# EAGLE board MODI (EAGLE 6.3)
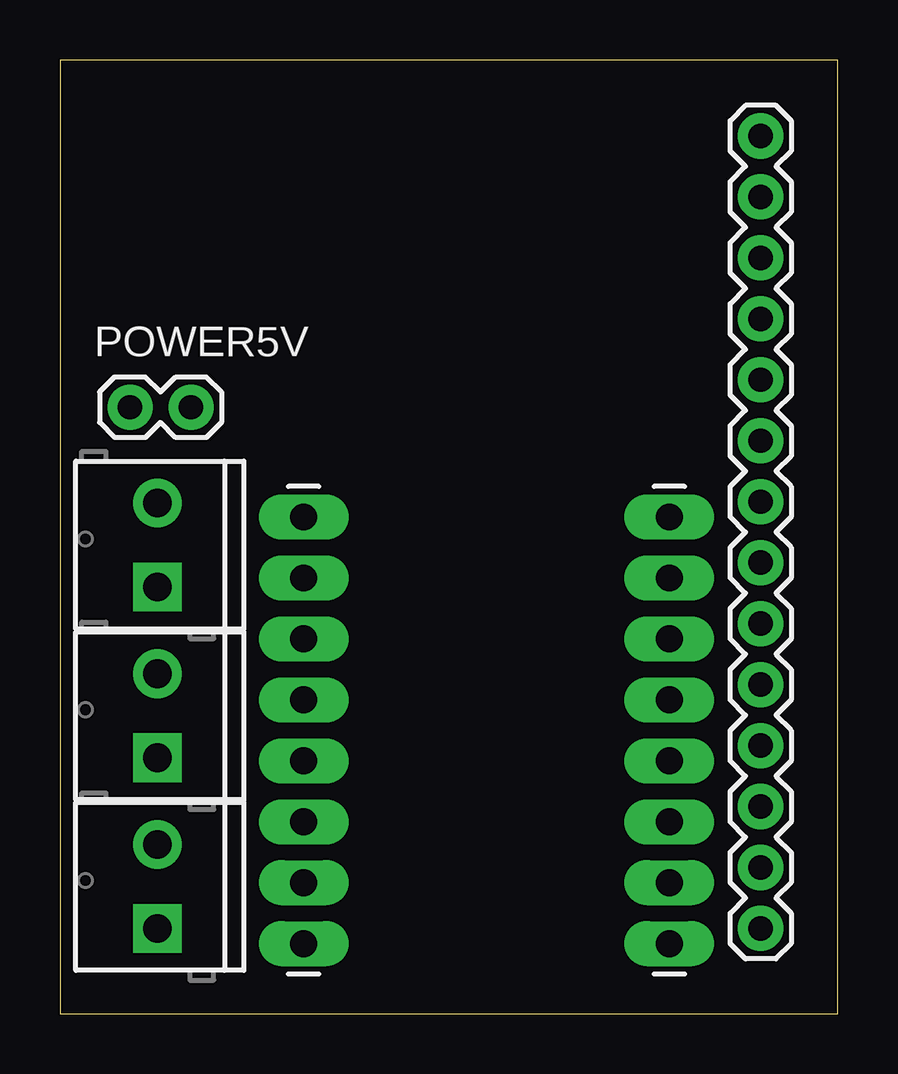
[diagram p0: board, top side]
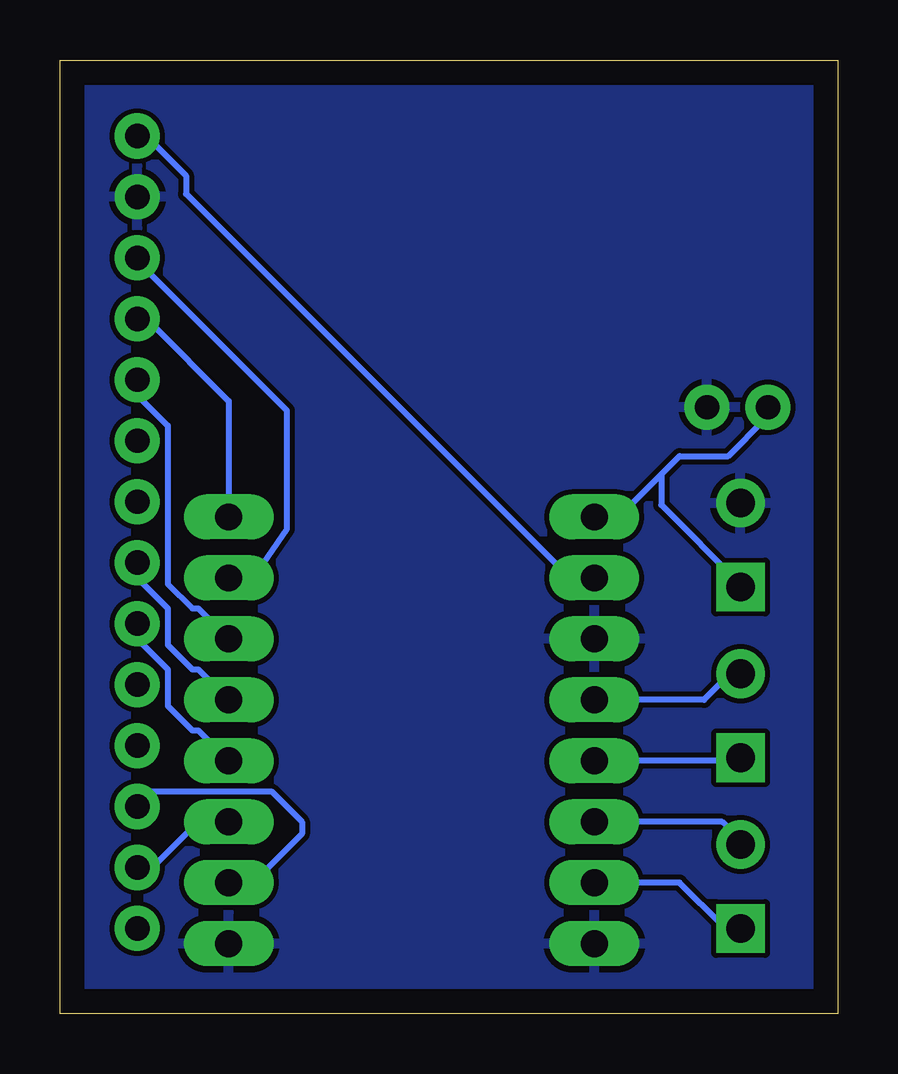
[diagram p1: board, bottom side, seen from below]

Size 32.44 x 39.74 mm. Coordinates in mm from the lower left corner, seen from the top.
Outline: 0,0 32.44,0 32.44,39.74 0,39.74 0,0
Copper layers (1*16): Top 0.035mm / dielectric 1.5mm / Bottom 0.035mm
Design rules "default": minimum track width 10mil, minimum drill 24mil, track to track 8mil, track to pad 8mil, pad to pad 8mil, via to via 8mil, smd to smd 8mil, copper to edge 40mil, drill to drill 8mil, minimum pad ring 10mil, minimum via ring 8mil, stop-mask expansion 4mil, vias tented up to drill 0mil, thermal gap 10mil

## Footprints (pad centres in the part's own frame; a part is rotated, then mirrored left to right if it is on the bottom)
1X14 = drill 1.016 pad 1.88: 1 0,0; 2 2.54,0; 3 5.08,0; 4 7.62,0; 5 10.16,0; 6 12.7,0; 7 15.24,0; 8 17.78,0; 9 20.32,0; 10 22.86,0; 11 25.4,0; 12 27.94,0; 13 30.48,0; 14 33.02,0
SCREWTERMINAL-3.5MM-2 = drill 1.2 pad 2.032 square: 1 0,0 | drill 1.2 pad 2.032: 2 3.5,0
1X02 = drill 1.016 pad 1.88: 1 0,0; 2 2.54,0
1X08_LONGPADS = drill 1.118 pad 1.88 long: 1 0,0; 2 2.54,0; 3 5.08,0; 4 7.62,0; 5 10.16,0; 6 12.7,0; 7 15.24,0; 8 17.78,0

## Placement (x,y rotation side)
FIO  M14  [1X14]  29.21,36.58 270 top
MOTOR1  [SCREWTERMINAL-3.5MM-2]  4.06,10.67 90 top
MOTOR2  [SCREWTERMINAL-3.5MM-2]  4.06,3.56 90 top
POWER  [SCREWTERMINAL-3.5MM-2]  4.06,17.78 90 top
POWER5V  [1X02]  2.92,25.27 0 top
PUENTEH_LEFT  [1X08_LONGPADS]  10.16,20.7 270 top
PUENTEH_RIGHT  [1X08_LONGPADS]  25.4,20.7 270 top

## Library data of the parts
FIO MOTOR1 MOTOR2 POWER POWER5V PUENTEH_LEFT PUENTEH_RIGHT = SparkFun-Connectors

## Nets
5V: POWER5V.1 POWER.1 PUENTEH_LEFT.1
GND: FIO.2 POWER5V.2 POWER.2 PUENTEH_LEFT.3 PUENTEH_LEFT.8 PUENTEH_RIGHT.8
N$1: FIO.3 PUENTEH_RIGHT.2
N$2: FIO.4 PUENTEH_RIGHT.1
N$3: FIO.5 PUENTEH_RIGHT.3
N$4: FIO.12 PUENTEH_RIGHT.7
N$5: FIO.8 PUENTEH_RIGHT.4
N$6: FIO.9 PUENTEH_RIGHT.5
N$7: FIO.13 PUENTEH_RIGHT.6
N$8: MOTOR1.2 PUENTEH_LEFT.4
N$9: MOTOR1.1 PUENTEH_LEFT.5
N$10: MOTOR2.2 PUENTEH_LEFT.6
N$11: MOTOR2.1 PUENTEH_LEFT.7
N$14: FIO.1 PUENTEH_LEFT.2

## Tracks (layer width: path | path; a pad name or v marks a point on that pad's centre or on a via)
5V
  Bottom 0.254: 7.37,22.48 9.14,20.7 PUENTEH_LEFT.1 | 7.37,22.48 6.6,23.24 4.57,23.24 3.05,24.77 3.05,25.27 POWER5V.1 | 7.37,22.48 7.37,21.21 4.06,17.91 POWER.1
GND
  pour Bottom: -1.27,40.64 33.02,40.64 33.02,-1.27 -1.27,-1.27
N$1
  Bottom 0.254: PUENTEH_RIGHT.2 24.38,18.16 22.99,20.19 22.99,25.15 29.21,31.37 FIO.3
N$2
  Bottom 0.254: PUENTEH_RIGHT.1 25.4,25.53 28.7,28.83 29.21,28.83 FIO.4
N$3
  Bottom 0.254: PUENTEH_RIGHT.3 26.67,16.89 26.92,16.89 27.94,17.91 27.94,24.51 29.21,25.78 FIO.5
N$4
  Bottom 0.254: PUENTEH_RIGHT.7 24.38,5.46 22.35,7.49 22.35,8 23.62,9.27 28.7,9.27 29.21,8.76 FIO.12
N$5
  Bottom 0.254: PUENTEH_RIGHT.4 26.67,14.35 26.92,14.35 27.94,15.37 27.94,16.89 29.21,18.16 FIO.8
N$6
  Bottom 0.254: PUENTEH_RIGHT.5 26.67,11.81 26.92,11.81 27.94,12.83 27.94,14.35 29.21,15.62 FIO.9
N$7
  Bottom 0.254: PUENTEH_RIGHT.6 26.67,8 28.45,6.22 29.21,6.22 FIO.13
N$8
  Bottom 0.254: PUENTEH_LEFT.4 5.59,13.08 4.57,14.1 4.06,14.1 MOTOR1.2
N$9
  Bottom 0.254: PUENTEH_LEFT.5 4.06,10.54 MOTOR1.1
N$10
  Bottom 0.254: PUENTEH_LEFT.6 4.83,8 4.06,7.24 MOTOR2.2
N$11
  Bottom 0.254: PUENTEH_LEFT.7 6.6,5.46 4.83,3.68 4.06,3.68 MOTOR2.1
N$14
  Bottom 0.254: PUENTEH_LEFT.2 11.18,18.16 27.18,34.16 27.18,34.92 28.7,36.45 29.21,36.45 FIO.1